# Altium PCB rev1.PcbDoc
Units mm, origin at the board's own origin, x right, y up, seen from the top; angles counter-clockwise.
Board outline 60.2 x 60.96 mm, 2 copper layers (Top Layer, Bottom Layer); 27 components, 18 nets, 78 pads, 11 vias.
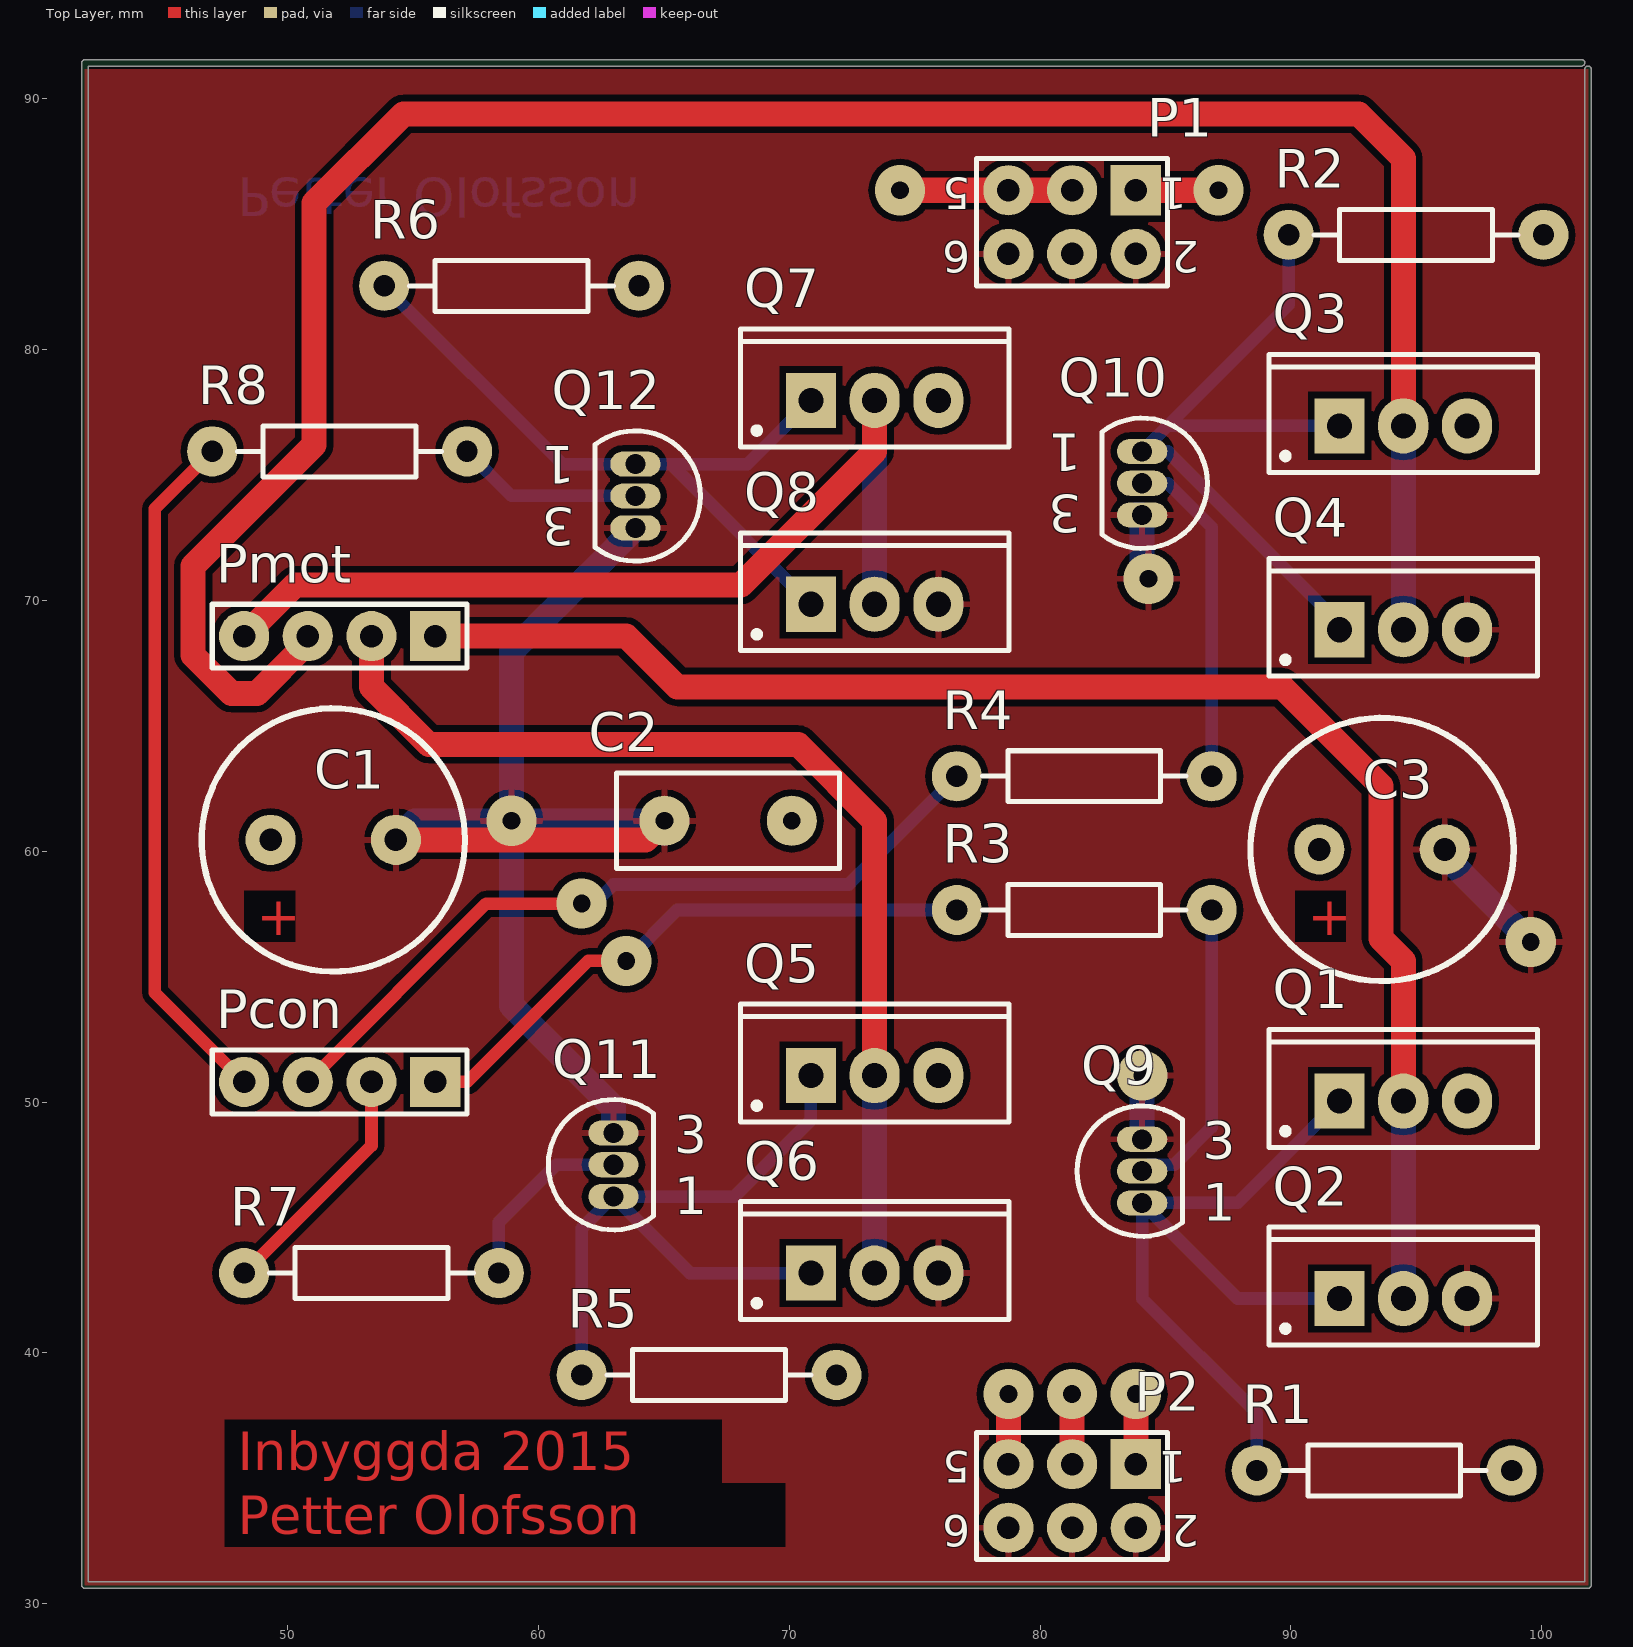
[diagram p0: Top Layer view]
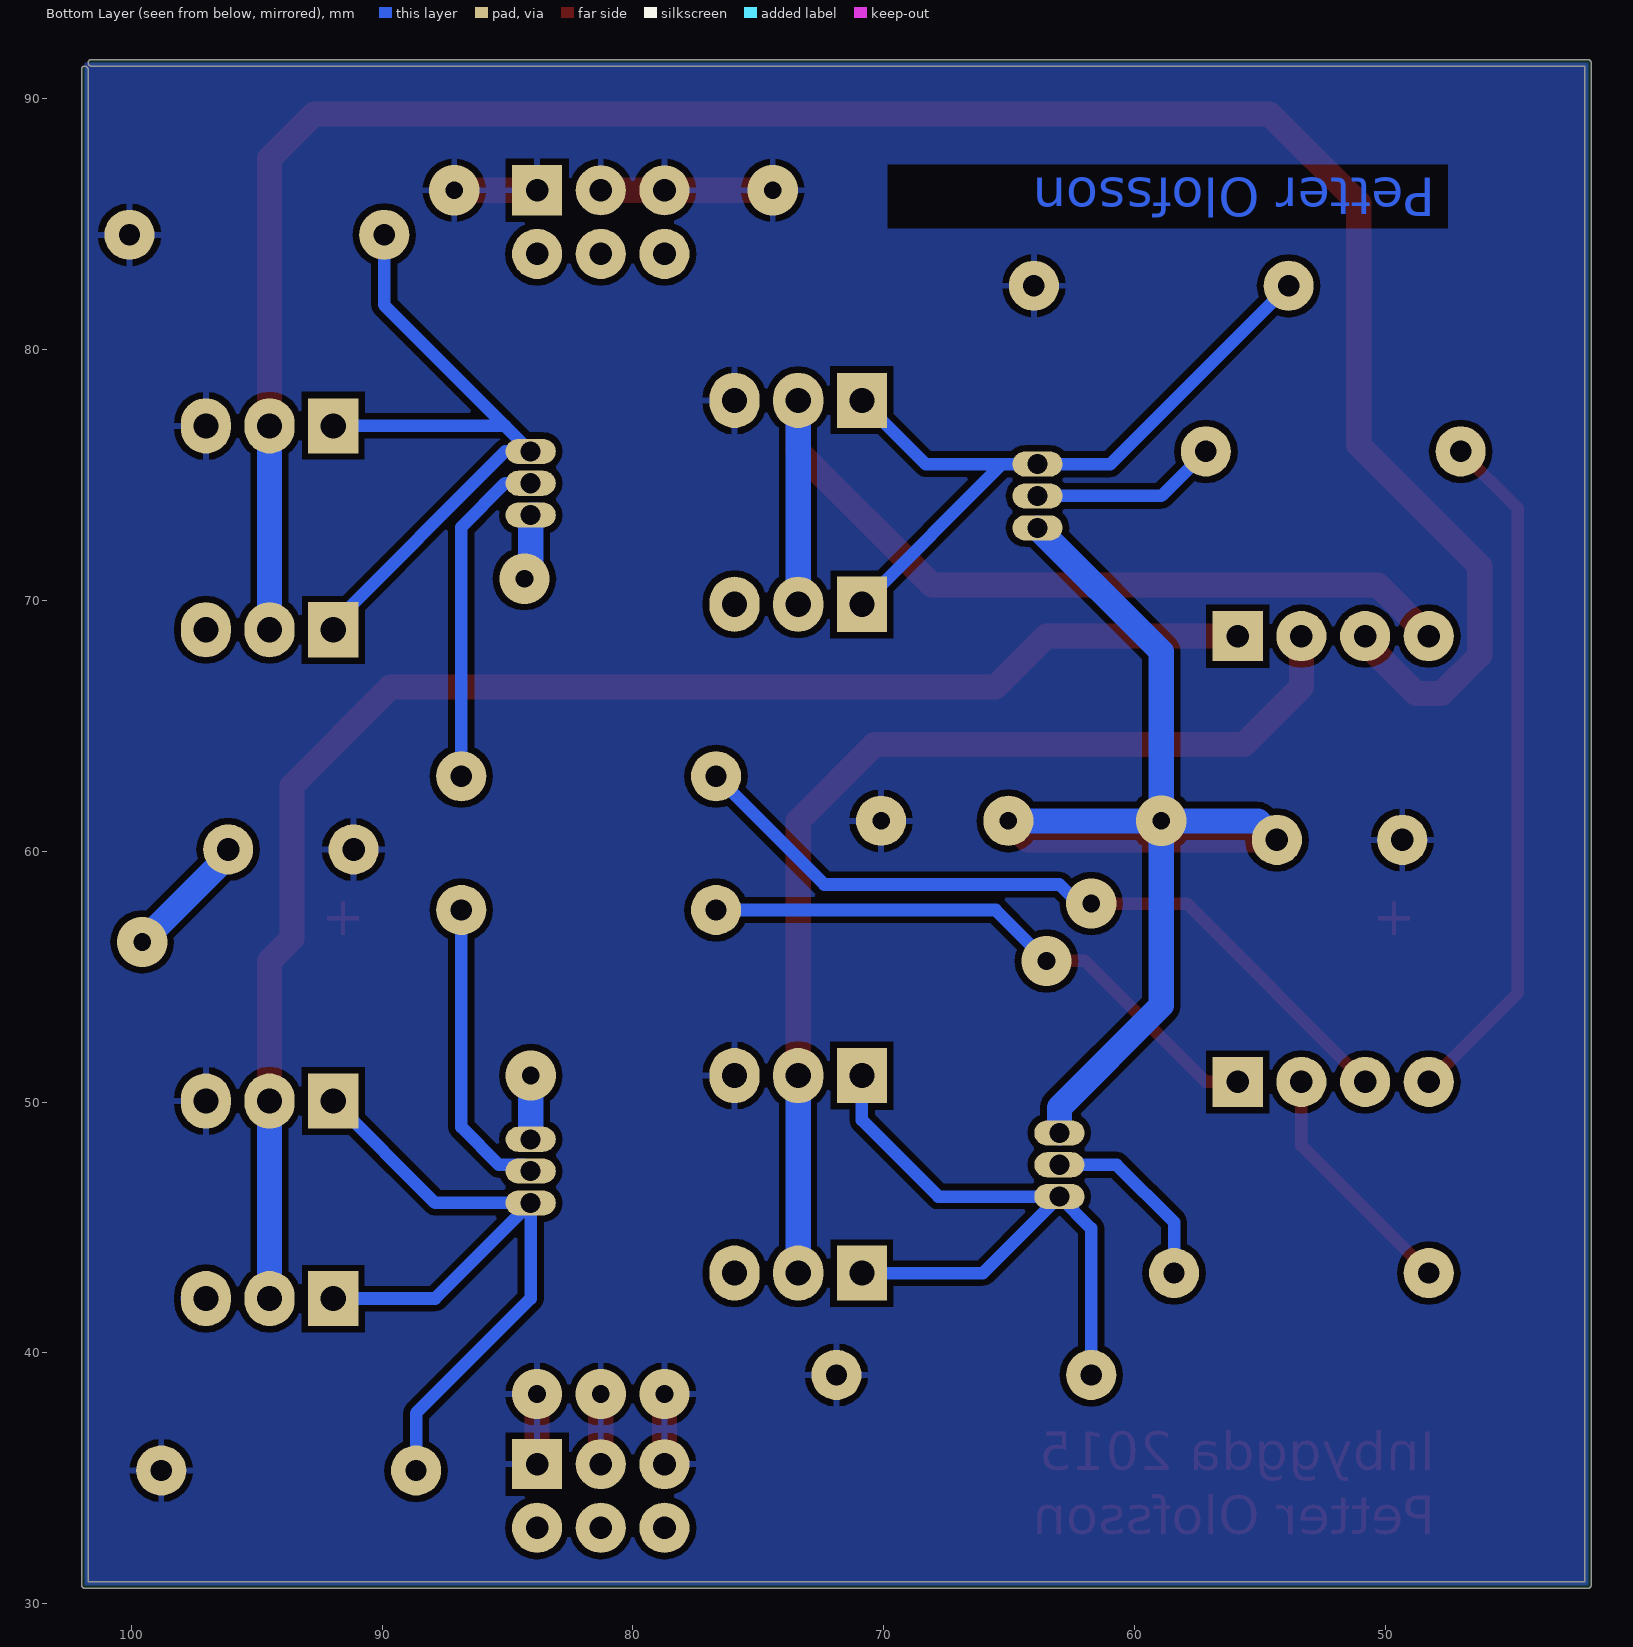
[diagram p1: Bottom Layer view, seen from below]

## Layer stack, top to bottom
Top Layer: signal copper 0.0356
Dielectric: dielectric 0.32, FR-4, Dk 4.8
Bottom Layer: signal copper 0.0356

## Board outline
41.783,30.734 41.783,91.44 cw(c41.91,91.44) 41.91,91.567 101.6,91.567 cw(c101.6,91.44) 101.727,91.44 cw(c101.6,91.44) 101.6,91.313 42.037,91.313 42.037,30.861 101.727,30.861 101.727,91.186 cw(c101.854,91.186) 101.981,91.186 101.981,30.734 cw(c101.854,30.734) 101.854,30.607 41.91,30.607 cw(c41.91,30.734)

## Design rules (kind name [scope] priority, off if disabled: settings)
Clearance [All] p1: gap=0.254
HoleSize [All] p1: absolutevalues=TRUE maxlimit=10 minlimit=0.8 maxpercent=80.000 minpercent=20.000
MinimumAnnularRing [All] p1: minimumring=0.3
PolygonConnect [All] p1: connectstyle=Relief reliefconductorwidth=0.254 reliefentries=4 polygonreliefangle="90 Angle"
RoutingVias [All] p1: holewidth=0.711 width=2 viastyle="Through Hole" minholewidth=0.711 minwidth=2 maxholewidth=0.711 maxwidth=2
SilkscreenOverComponentPads SilkToSolderMaskClearance [IsPad] p1: minsilkscreentomaskgap=0.254
SolderMaskExpansion [All] p1: expansion=0.102
Width [All] p1: maxlimit=3 minlimit=0.4 preferedwidth=1
26 further rules are at their usual default settings.

## Components (designator, comment, footprint, x,y, rotation, side; value= is the part's Value field where it differs from the comment)
C1 "Cap Pol1" RB5-10.5 51.816,60.452 r0 top
C2 "Cap" RAD-0.2 67.564,61.214 r0 top
C3 "Cap Pol1" RB5-10.5 93.639,60.071 r0 top (schematic designator C1)
P1 "Header 3X2" HDR2X3 83.82,86.36 r180 top locked
P2 "Header 3X2" HDR2X3 83.82,35.56 r180 top locked
Pcon "Header 4" HDR1X4 55.88,50.8 r180 top locked
Pmot "Header 4" HDR1X4 55.88,68.58 r180 top locked
Q1 "IRF9520NL" TO-262 94.488,50.038 r0 top
Q2 "IRFZ44N" TO-220AB 94.488,42.164 r0 top
Q3 "IRF9520NL" TO-262 94.488,76.962 r0 top
Q4 "IRFZ44N" TO-220AB 94.488,68.834 r0 top
Q5 "IRF9520NL" TO-262 73.406,51.054 r0 top
Q6 "IRFZ44N" TO-220AB 73.406,43.18 r0 top
Q7 "IRF9520NL" TO-262 73.406,77.978 r0 top
Q8 "IRFZ44N" TO-220AB 73.406,69.85 r0 top
Q9 "BC337-40" 29-04 84.074,47.244 r0 top
Q10 "BC337-40" 29-04 84.074,74.676 r180 top
Q11 "BC337-40" 29-04 62.992,47.498 r0 top
Q12 "BC337-40" 29-04 63.863,74.168 r180 top
R1 "Res2" AXIAL-0.4 93.726,35.306 r0 top
R2 "Res2" AXIAL-0.4 94.996,84.582 r0 top
R3 "Res2" AXIAL-0.4 81.763,57.658 r180 top
R4 "Res2" AXIAL-0.4 81.763,62.992 r180 top
R5 "Res2" AXIAL-0.4 66.802,39.116 r0 top
R6 "Res2" AXIAL-0.4 58.928,82.55 r0 top
R7 "Res2" AXIAL-0.4 53.34,43.18 r180 top
R8 "Res2" AXIAL-0.4 52.07,75.946 r180 top

## Footprints (in the part's own frame and the unit in brackets; to place one, negate y for a bottom-side part, rotate by r counter-clockwise, add the part's x,y. Pads: shape width x height; smd on the part's side, far side on the other; paste and mask are expansions set on the pad)
29-04 [mm] "TO, Flat Index; 3 In-Line, Axial Leads; Body Dia. 4.8mm; Leads 0.48 x 0.5 mm (max)"
  oval 2x1 hole 0.8: 1(0,-1.27) 2(0,0) 3(0,1.27)
  silkscreen extent -2.6,-2.6 1.6,2.6
AXIAL-0.4 [mm] "Axial Device, Thru-Hole; 2 Leads; 0.4 in Pin Spacing"
  round 2 hole 0.85: 1(-5.08,0) 2(5.08,0)
  silkscreen extent -4.06,-1.02 4.06,1.02
HDR1X4 [mm] "Connector; Header; 4 Position"
  rect 2x2 hole 0.9: 1(0,0)
  round 2 hole 0.9: 2(2.54,0) 3(5.08,0) 4(7.62,0)
  silkscreen extent -1.27,-1.27 8.89,1.27
HDR2X3 [mm] "Connector; Header; 3x2 Position"
  rect 2x2 hole 0.9: 1(0,0)
  round 2 hole 0.9: 2(0,2.54) 3(2.54,0) 4(2.54,2.54) 5(5.08,0) 6(5.08,2.54)
  silkscreen extent -1.27,-1.27 6.35,3.81
RAD-0.2 [mm] "Radial Cap, Thru-Hole; 2 Leads; 0.2 in Pin Spacing"
  round 2 hole 0.7: 1(-2.54,0) 2(2.54,0)
  silkscreen extent -4.44,-1.91 4.44,1.91
RB5-10.5 [mm] "Capacitor (Radial); 2 Leads"
  round 2 hole 0.9: 1(-2.5,0) 2(2.5,0)
  silkscreen extent -5.25,-5.25 5.25,5.25
TO-220AB [mm] "TO, Thru-Hole, Vertical, Heatsink Mounted; 3 In-Line Leads; Pitch 2.54 mm"
  rect 2x2.2 hole 1: 1(-2.54,0)
  oval 2x2.2 hole 1: 2(0,0) 3(2.54,0)
  silkscreen extent -5.35,-1.85 5.35,2.85, body extent -5.4,-1.9 5.4,2.9, height 19.3
TO-262 [mm] "TO, Thru-Hole, Vertical, Heatsink Mounted; 3 In-Line Leads; Pitch 2.54 mm"
  rect 2x2.2 hole 1: 1(-2.54,0)
  oval 2x2.2 hole 1: 2(0,0) 3(2.54,0)
  silkscreen extent -5.35,-1.85 5.35,2.85, body extent -5.4,-1.9 5.4,2.9, height 14.6

## Part data
C1 C3: "Polarized Capacitor (Radial)"
C2: "Capacitor"
P1 P2: "Header, 3-Pin, Dual row"
Pcon Pmot: "Header, 4-Pin"
Q1 Q2 Q3 Q4 Q5 Q6 Q7 Q8: "HEXFET Power MOSFET"
Q9 Q10 Q11 Q12: "Amplifier Transistor NPN Silicon"
R1 R2 R3 R4 R5 R6 R7 R8: "Resistor"

## Via types
v1: diameter 2, hole 0.711, Top Layer to Bottom Layer, 11 vias

## Nets (pads, with @x,y where several pads share a name; then routed paths per layer and width w, separated by ;. In a path a pad name is that pad's centre, name@x,y a point inside that pad or via, vN(x,y) a via of type N, cw(c..) or ccw(c..) an arc to the next point about the centre after c; other vN are vias at no path point)
CONTROL1: Pcon.1 R3.2 | length 23.6
  Top Layer w0.5: Pcon.1 57.15,50.8 61.976,55.626 v1(63.5,55.626)
  Bottom Layer w0.5: v1(63.5,55.626) 65.532,57.658 R3.2
CONTROL2: Pcon.2 R7.2 | length 9.7
  Top Layer w0.5: R7.2 53.34,48.26 Pcon.2
CONTROL3: Pcon.3 R4.2 | length 31.7
  Top Layer w0.5: Pcon.3 57.912,57.912 v1(61.722,57.912)
  Bottom Layer w0.5: v1(61.722,57.912) 61.722,57.404 62.992,58.674 72.365,58.674 R4.2
CONTROL4: Pcon.4 R8.2 | length 27.6
  Top Layer w0.5: R8.2 44.704,73.66 44.704,54.356 Pcon.4
GND: C1.2 C2.1 C3.2 P1.2 P1.4 P1.6 P2.2 P2.4 P2.6 Q2.3 Q4.3 Q6.3 Q8.3 Q9.3 Q10.3 Q11.3 Q12.3 | length 61
  Top Layer w1: C1.2 64.262,60.452 C2.1
  Bottom Layer w1: C1.2 55.078,61.214 v1(58.928,61.214) ; Q11.3 62.992,49.784 58.928,53.848 v1(58.928,61.214) ; Q12.3 58.928,67.963 v1(58.928,61.214) ; C2.1 v1(58.928,61.214) ; Q10.3@83.82,73.406 Q10.3 84.074,71.12 v1(84.328,70.866) ; Q9.3 v1(84.074,51.054) ; C3.2 96.139,59.817 v1(99.568,56.388) ; Q2.3 Q2.3@97.536,42.164
NetQ1_1: Q1.1 Q2.1 Q9.1 R1.1 | length 31.6
  Bottom Layer w0.5: R1.1 88.646,37.592 84.074,42.164 Q9.1 ; Q2.1 87.884,42.164 Q9.1 ; Q1.1 87.884,45.974 Q9.1
NetQ3_1: Q3.1 Q4.1 Q10.1 R2.1 | length 28.9
  Bottom Layer w0.5: R2.1 89.916,81.788 85.09,76.962 ; Q4.1 91.948,69.088 85.09,75.946 Q10.1 85.09,76.962 ; Q3.1 85.09,76.962
NetQ5_1: Q5.1 Q6.1 Q11.1 R5.1 | length 27.7
  Bottom Layer w0.5: R5.1 61.722,44.958 Q11.1 ; Q6.1 66.04,43.18 Q11.1 ; Q5.1 70.866,49.276 67.818,46.228 Q11.1
NetQ7_1: Q7.1 Q8.1 Q12.1 R6.1 | length 28.9
  Bottom Layer w0.5: R6.1 60.96,75.438 Q12.1 65.278,75.438 ; Q8.1 65.278,75.438 ; Q7.1 68.326,75.438 65.278,75.438
NetQ9_2: Q9.2 R3.1 | length 12.2
  Bottom Layer w0.5: Q9.2 84.328,47.498 85.344,47.498 86.843,48.997 R3.1
NetQ10_2: Q10.2 R4.1 | length 13.4
  Bottom Layer w0.5: Q10.2 85.09,74.676 86.843,72.923 R4.1
NetQ11_2: Q11.2 R7.1 | length 7.6
  Bottom Layer w0.5: R7.1 58.42,45.212 60.706,47.498 Q11.2
NetQ12_2: Q12.2 R8.1 | length 7.4
  Bottom Layer w0.5: R8.1 58.928,74.168 Q12.2
OUT1: Pmot.1 Q1.2 Q2.2 | length 61
  Top Layer w1: Pmot.1 63.5,68.58 65.532,66.548 89.662,66.548 93.599,62.611 93.599,56.515 94.488,55.626 Q1.2
  Bottom Layer w1: Q2.2 Q1.2
OUT2: Pmot.2 Q5.2 Q6.2 | length 42.3
  Top Layer w1: Pmot.2 53.34,66.548 55.626,64.262 70.358,64.262 73.406,61.214 Q5.2
  Bottom Layer w1: Q6.2 Q5.2
OUT3: Pmot.3 Q3.2 Q4.2 | length 90.8
  Top Layer w1: Pmot.3 50.8,68.326 48.768,66.294 47.752,66.294 46.228,67.818 46.228,71.374 51.054,76.2 51.054,85.852 54.61,89.408 92.71,89.408 94.488,87.63 Q3.2
  Bottom Layer w1: Q4.2 Q3.2
OUT4: Pmot.4 Q7.2 Q8.2 | length 38.4
  Top Layer w1: Pmot.4 50.292,70.612 68.072,70.612 73.406,75.946 Q7.2
  Bottom Layer w1: Q8.2 Q7.2
VCC: C1.1 C2.2 C3.1 P1.1 P1.3 P1.5 P2.1 P2.3 P2.5 Q1.3 Q3.3 Q5.3 Q7.3 R1.2 R2.2 R5.2 R6.2 | length 18.5
  Top Layer w1: v1(74.422,86.36) P1.5 P1.3 ; P2.5 v1(78.74,38.354) ; P2.3 v1(81.28,38.354) ; P2.1 v1(83.82,38.354) ; P1.1 v1(87.122,86.36)

## Polygon pours and split planes (outlines as drawn)
GND on Top Layer "Top Layer-No Net" (solid, pour order 4): 41.91,30.734 41.91,91.186 101.854,91.186 101.854,30.734 41.91,30.734
VCC on Bottom Layer "Bot vcc" (solid, pour order 6): 41.91,30.734 41.91,91.44 101.854,91.44 101.854,30.734 41.91,30.734

## Other copper
Top Layer:
  text "+" at 48.768,56.642 h1.52
  text "+" at 90.678,56.642 h1.52
  text "Inbyggda 2015" at 48.006,35.306 h1.52
  text "Petter Olofsson" at 48.006,32.766 h1.52
Bottom Layer:
  text "Petter Olofsson" at 48.006,86.868 h1.52 r180

## Silkscreen, mask and mechanical layers (free items; w line width, h text height)
Mechanical 1:
  lines w0.254: 41.91,30.734 41.91,91.44 101.6,91.44 101.854,91.186 101.854,30.734 41.91,30.734

## Text inside footprints (layer, text, board x,y; h text height)
P1: Top Overlay "6" at 77.216,84.328 h1.27 r180; Top Overlay "5" at 77.216,86.868 h1.27 r180; Top Overlay "2" at 86.36,84.328 h1.27 r180; Top Overlay "1" at 85.852,86.868 h1.27 r180
P2: Top Overlay "6" at 77.216,33.528 h1.27 r180; Top Overlay "5" at 77.216,36.068 h1.27 r180; Top Overlay "2" at 86.36,33.528 h1.27 r180; Top Overlay "1" at 85.852,36.068 h1.27 r180
Q9: Top Overlay "3" at 86.495,47.711 h1.5; Top Overlay "1" at 86.495,45.265 h1.5
Q10: Top Overlay "3" at 81.653,74.209 h1.5 r180; Top Overlay "1" at 81.653,76.655 h1.5 r180
Q11: Top Overlay "3" at 65.413,47.965 h1.5; Top Overlay "1" at 65.413,45.519 h1.5
Q12: Top Overlay "3" at 61.442,73.701 h1.5 r180; Top Overlay "1" at 61.442,76.147 h1.5 r180